# Altium PCB Core.PcbDoc
Units mil, origin at the board's own origin, x right, y up, seen from the top; angles counter-clockwise.
Board outline 1574.8 x 1620 mil, 2 copper layers (Top Layer, Bottom Layer); 36 components, 49 nets, 173 pads, 22 vias.
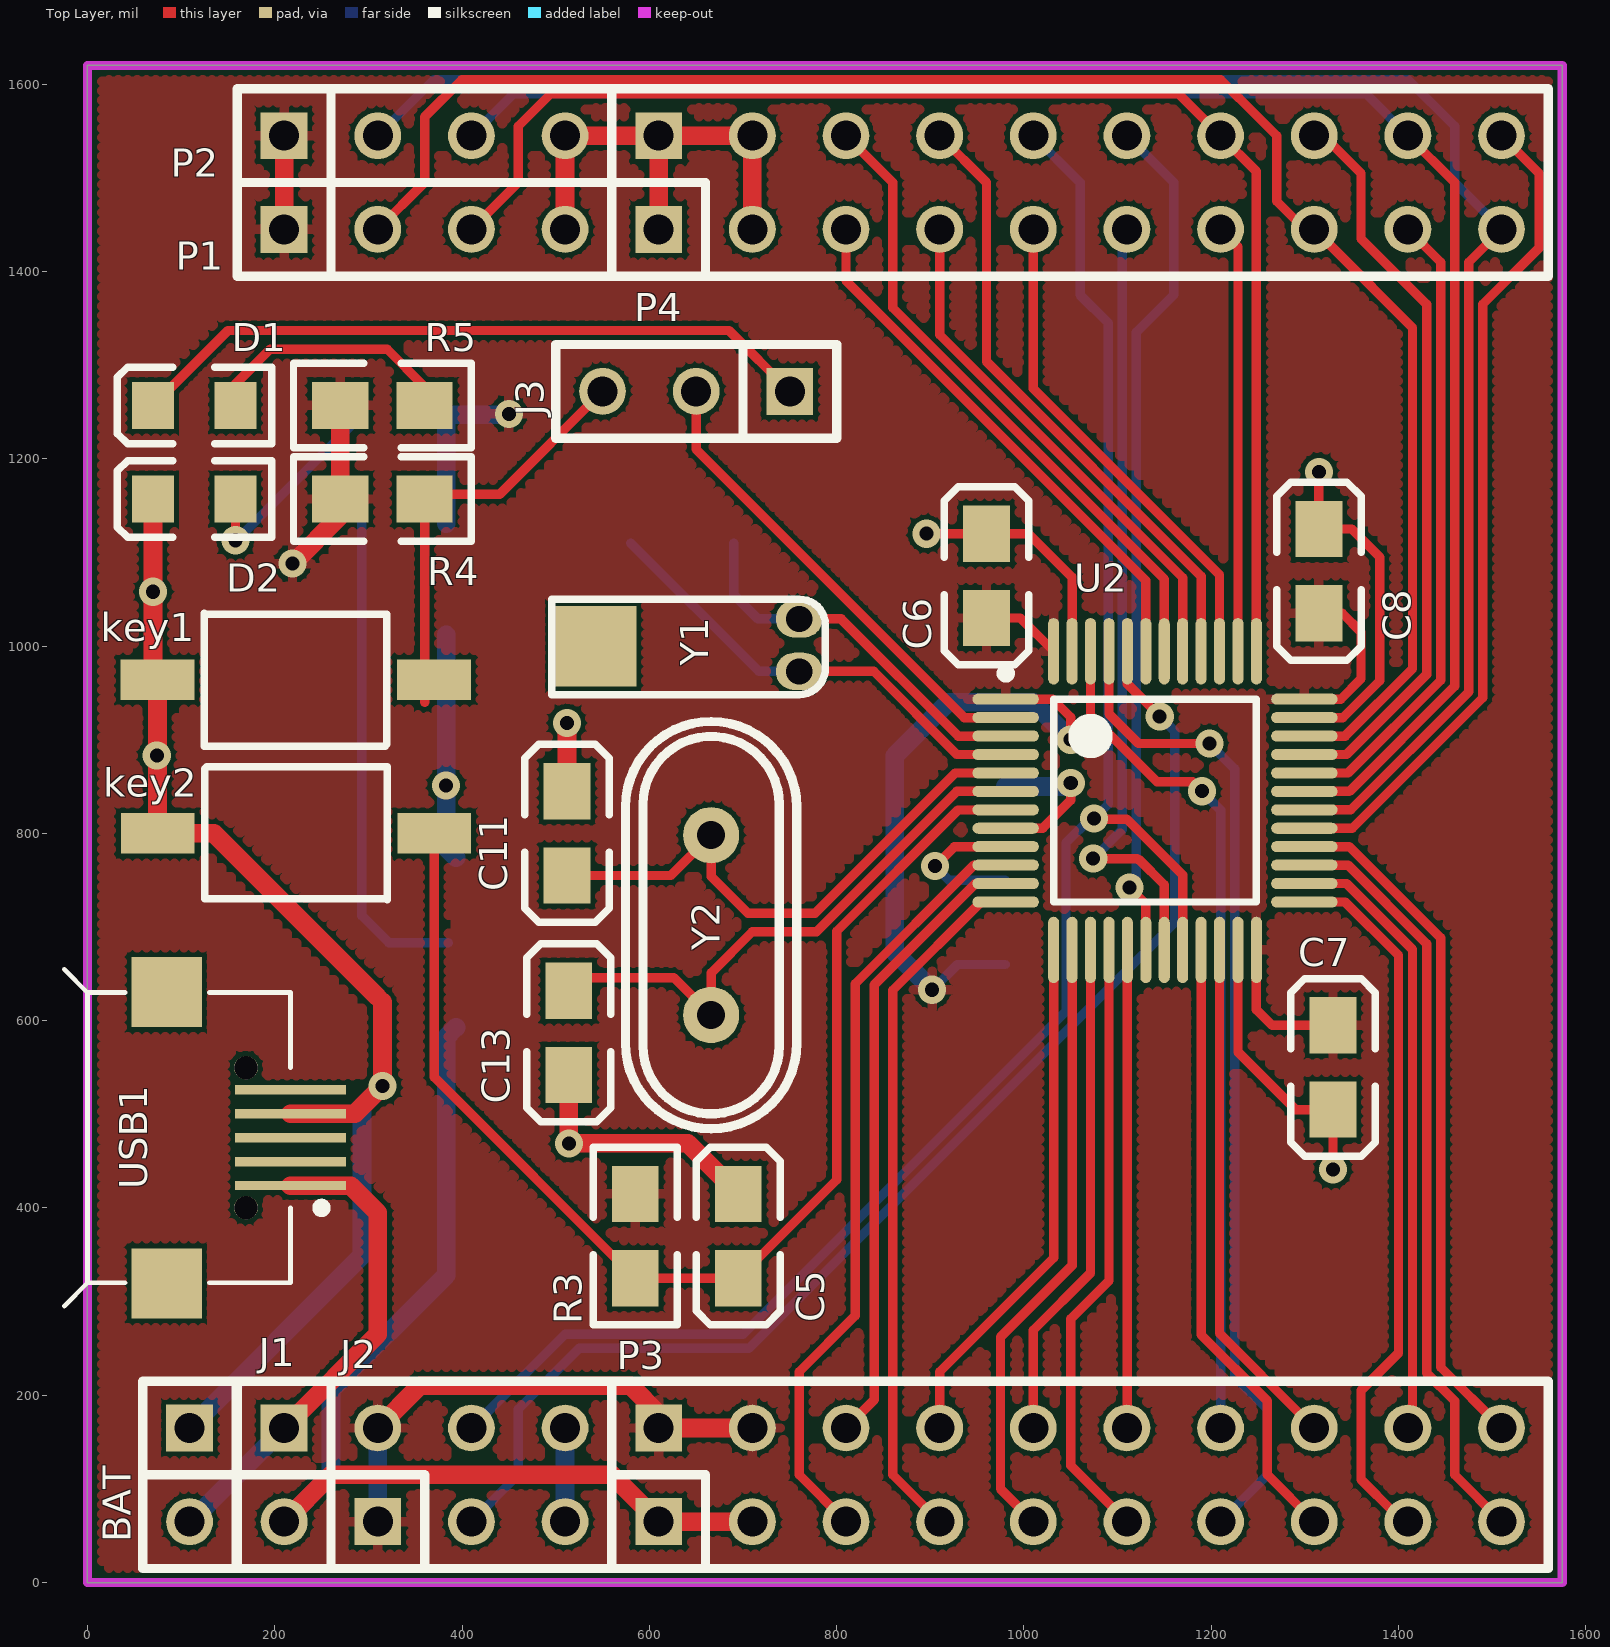
[diagram p0: Top Layer view]
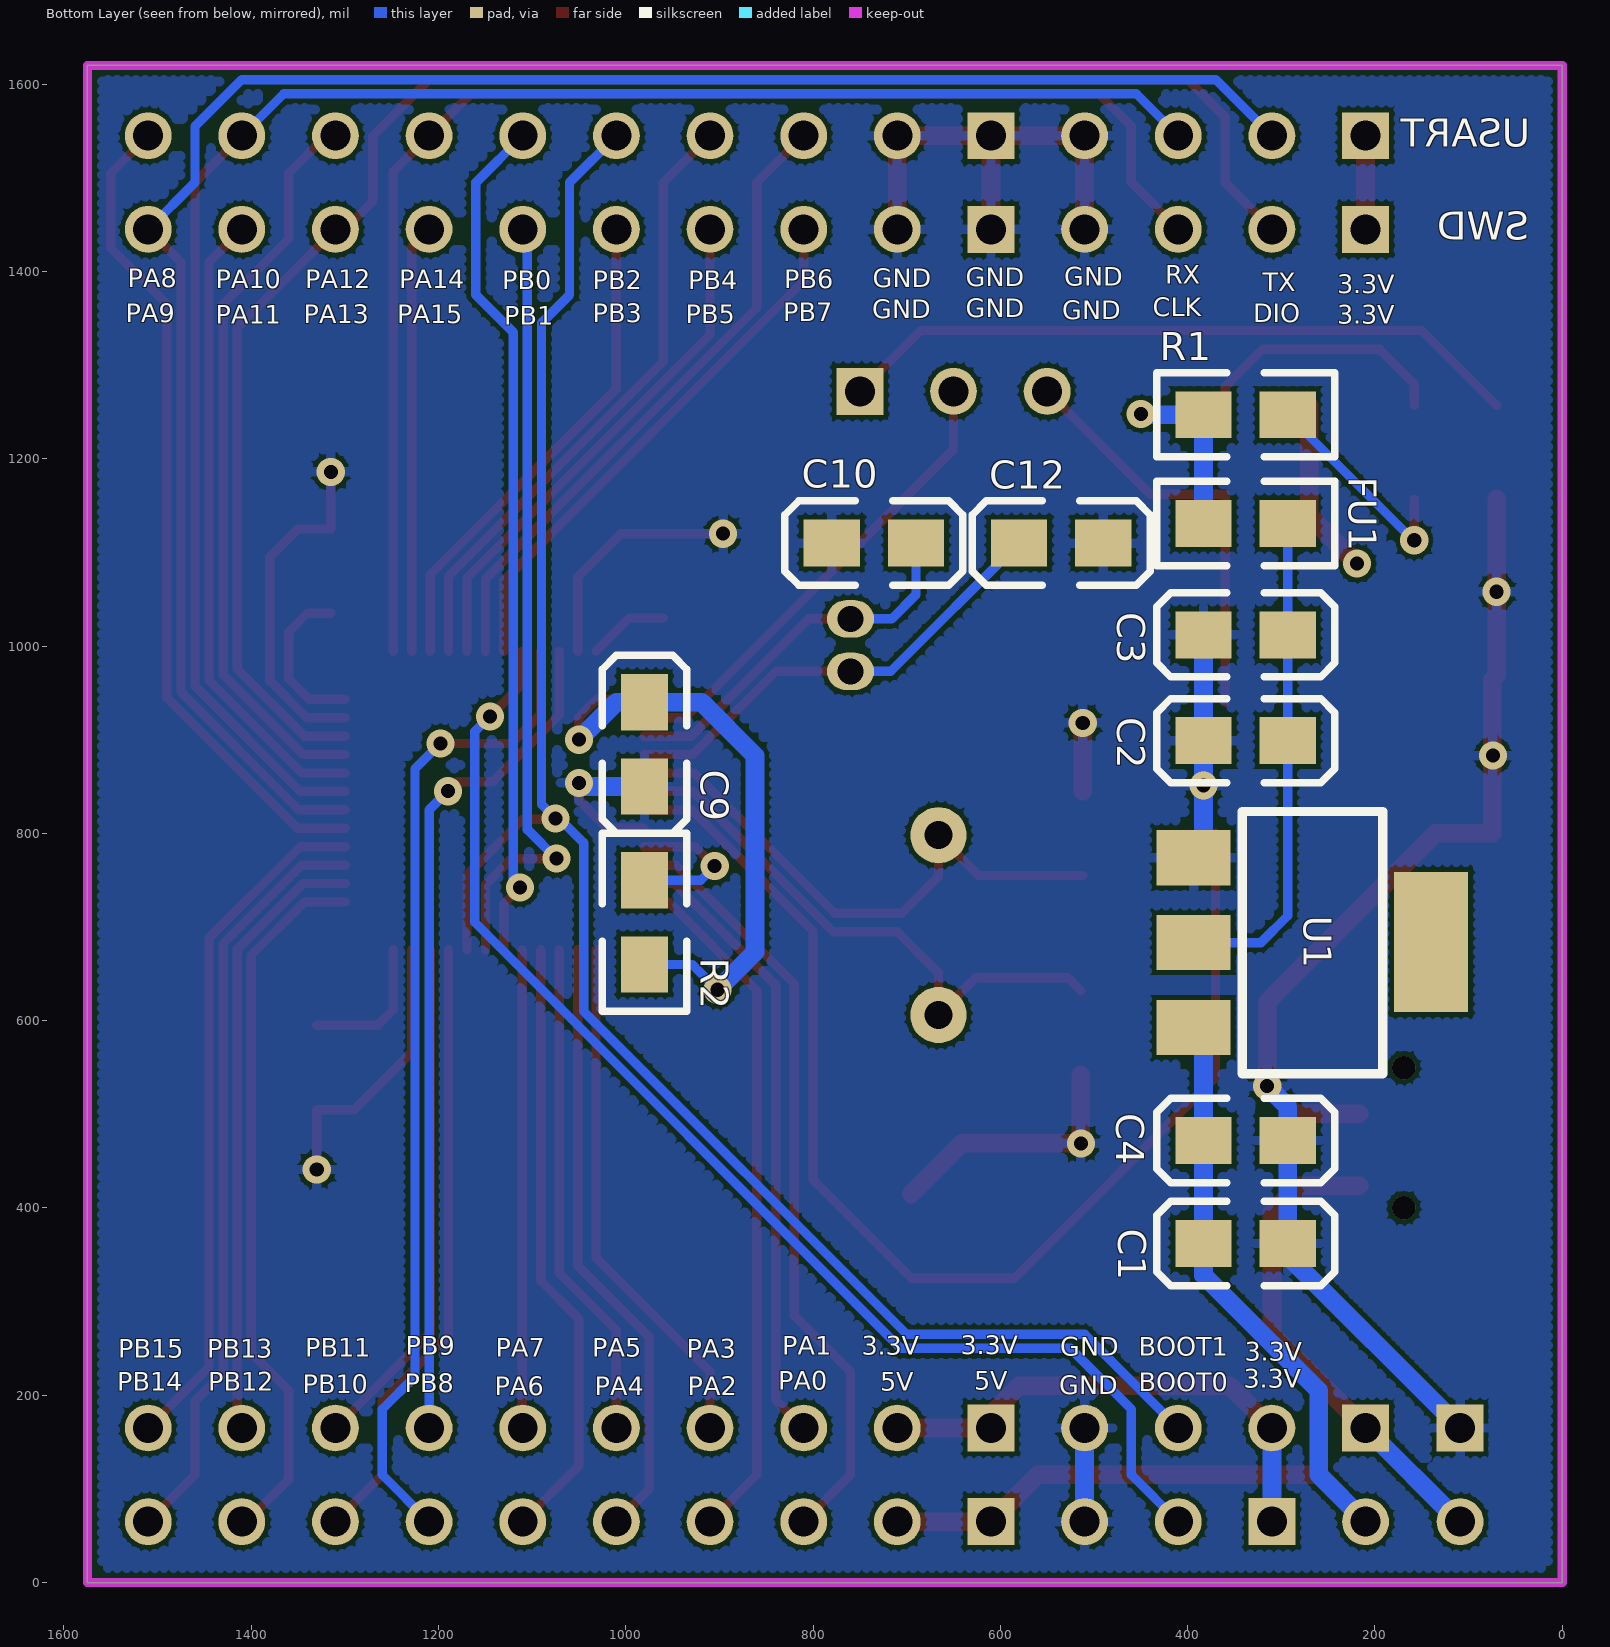
[diagram p1: Bottom Layer view, seen from below]
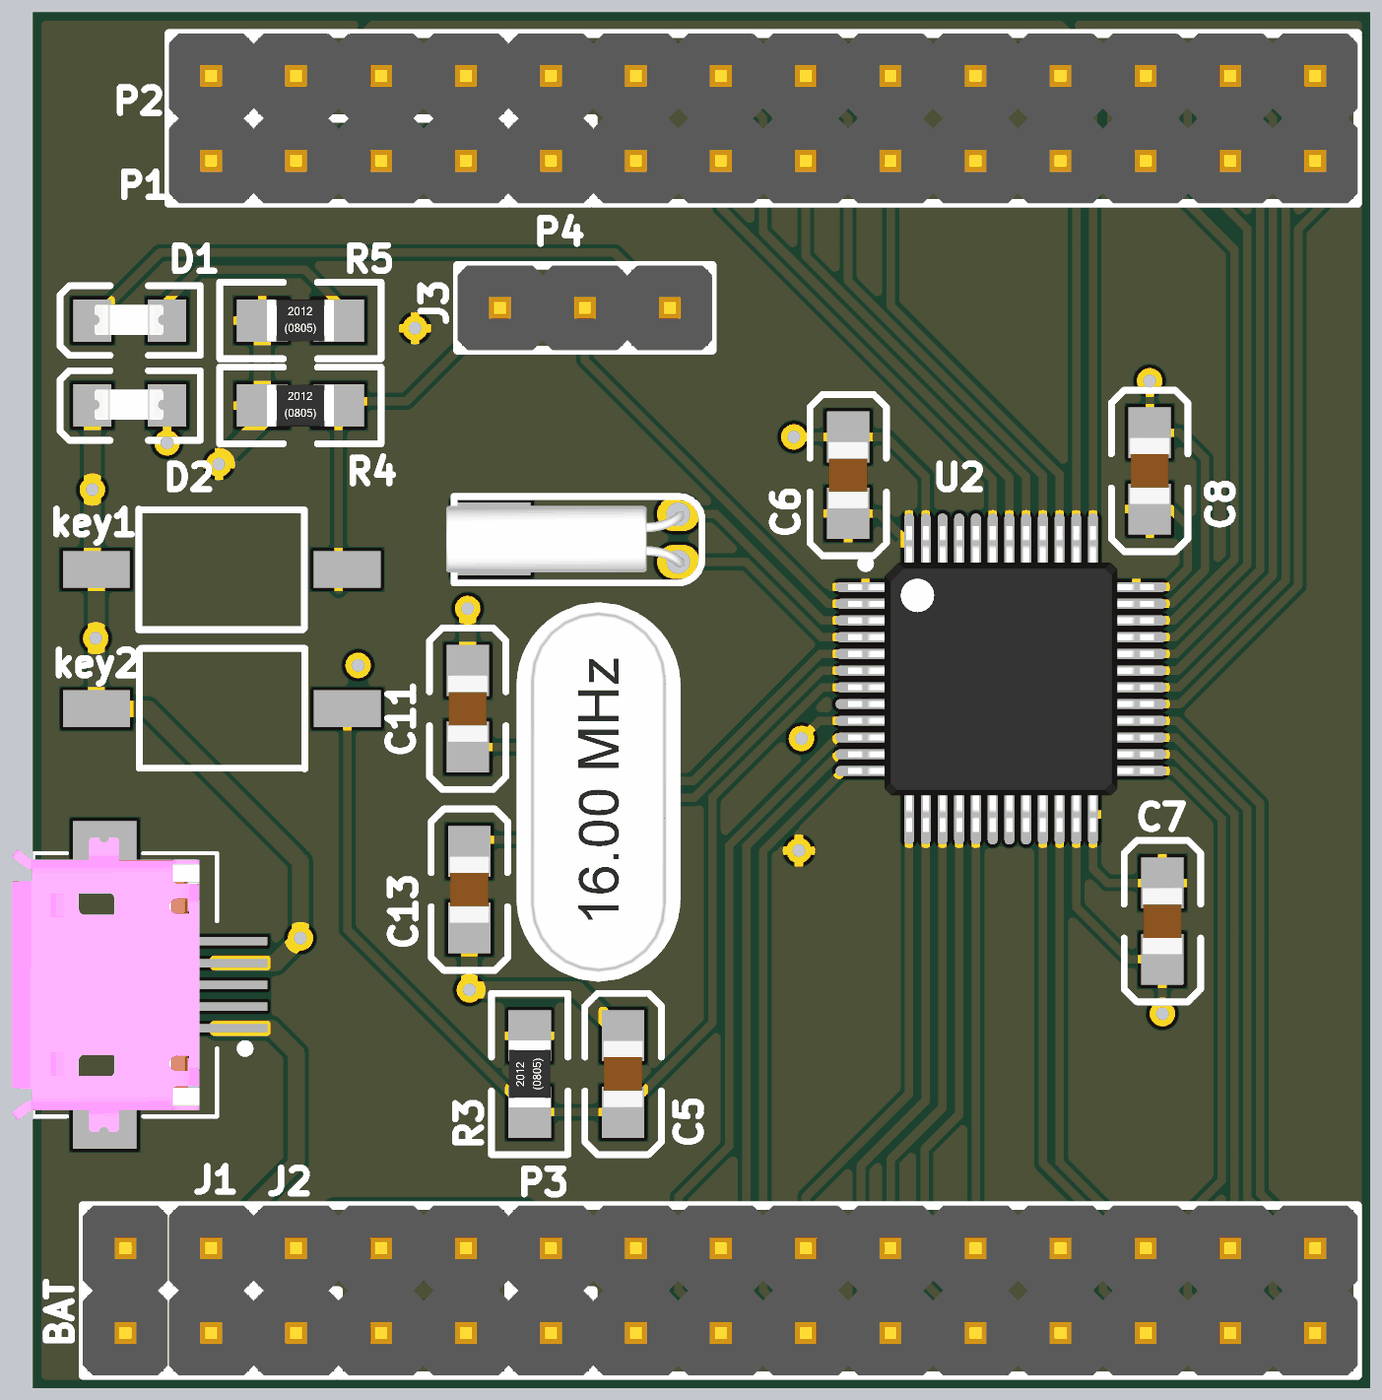
[diagram p2: 3D render of the assembled board from above, using the file's embedded part models]
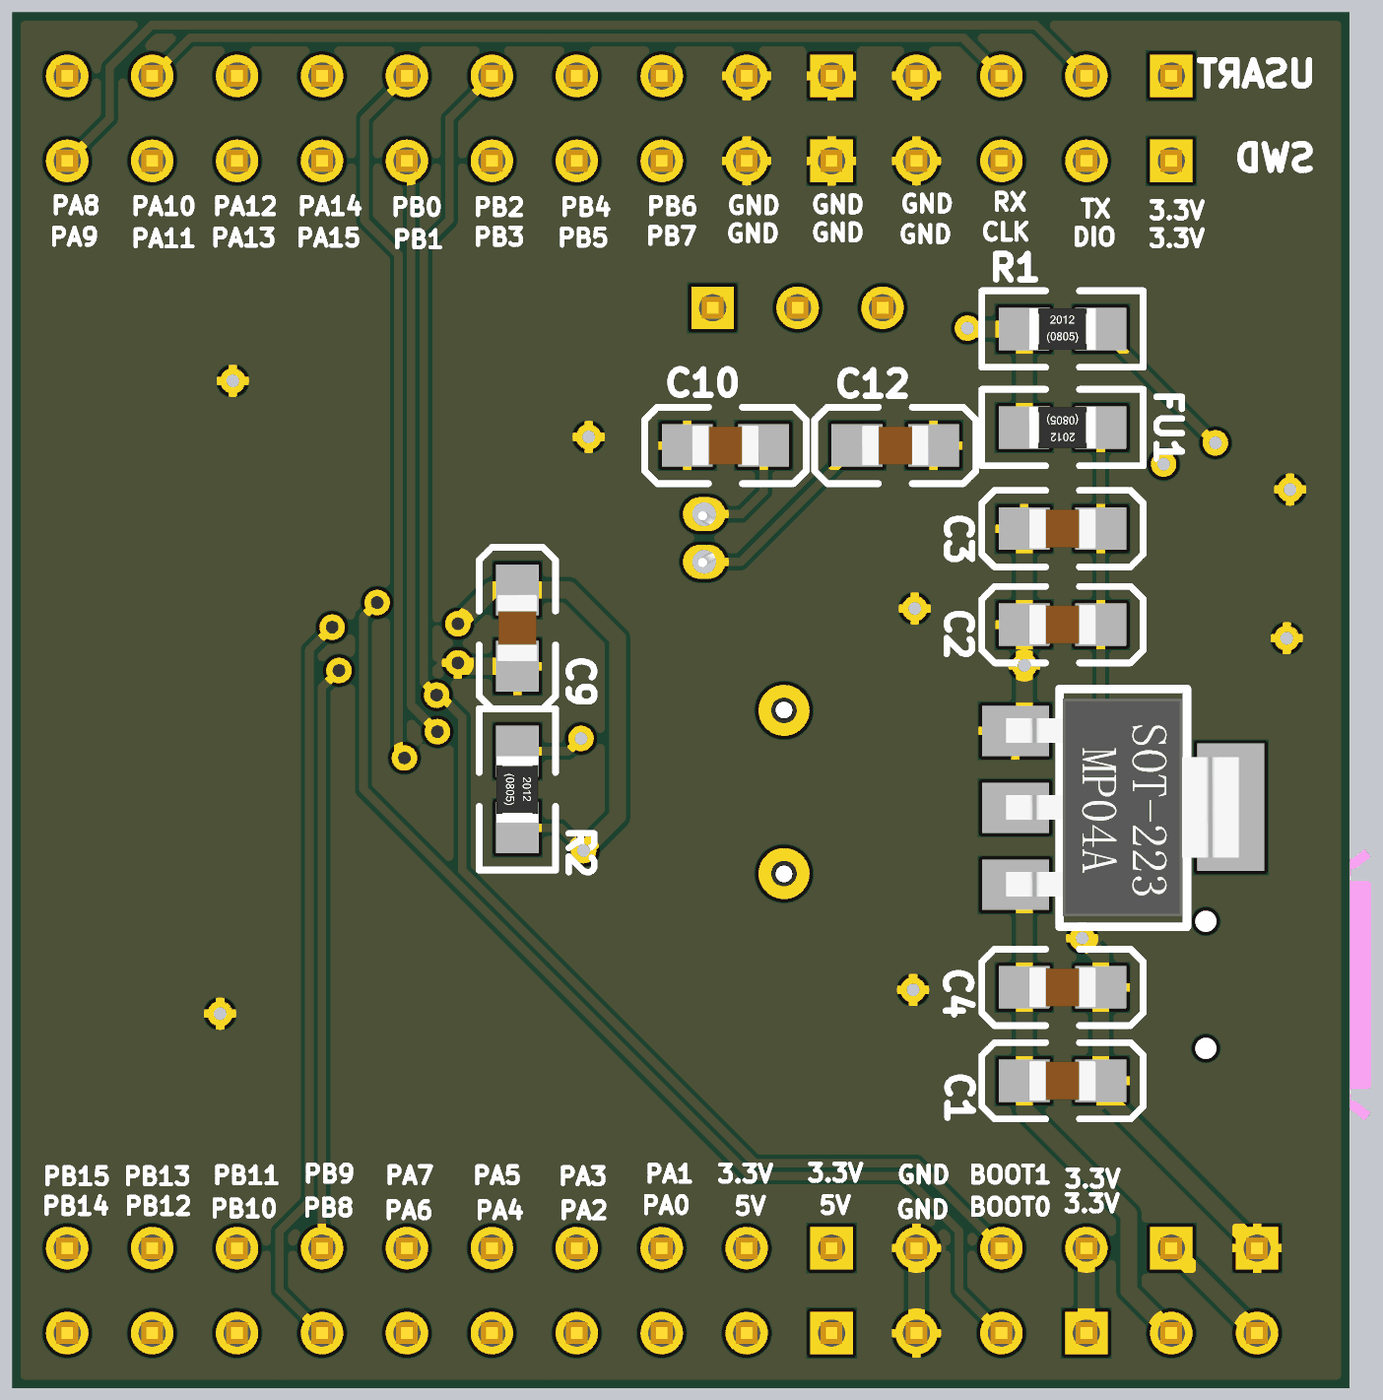
[diagram p3: 3D render of the assembled board from below, using the file's embedded part models]

## Layer stack, top to bottom
Top Layer: signal copper 1.4
Dielectric: dielectric 12.6, FR-4, Dk 4.8
Bottom Layer: signal copper 1.4

## Board outline
0,1620 0,0 1574.8,0 1574.8,1620 0,1620

## Design rules (kind name [scope] priority, off if disabled: settings)
Clearance slik [OnLayer('Top Overlay') vs OnLayer('Top Overlay')] p1: gap=2
Clearance [All] p2: gap=5
MinimumSolderMaskSliver [All] p1: minsoldermaskwidth=4
PolygonConnect [All] p1: connectstyle=Relief reliefconductorwidth=10 reliefentries=4 polygonreliefangle="90 Angle"
RoutingVias [All] p1: holewidth=15 width=30 viastyle="Through Hole" minholewidth=10 minwidth=20 maxholewidth=20 maxwidth=40
SilkToSilkClearance [All] p1: silktosilkclearance=0
SilkscreenOverComponentPads [All] p1: minsilkscreentomaskgap=-100
SolderMaskExpansion [All] p1: expansion=4
Width PWR [InNetClass('PWR')] p1: maxlimit=60 minlimit=20 preferedwidth=25
Width [All] p2: maxlimit=20 minlimit=6 preferedwidth=10
25 further rules are at their usual default settings.

## Components (designator, comment, footprint, x,y, rotation, side; value= is the part's Value field where it differs from the comment)
BAT "CON2" SIP2 109,165 r270 top
C1 "Cap" 0805C 383.04,362 r180 bottom
C2 "CapPol" 0805C 293.04,899 r0 bottom
C3 "Cap" 0805C 293.04,1012 r0 bottom
C4 "CapPol" 0805C 383.04,472 r180 bottom
C5 "Cap" 0805C 695,415 r270 top
C6 "Cap" 0805C 960,1030 r90 top
C7 "Cap" 0805C 1330,595 r270 top
C8 "Cap" 0805C 1315,1035 r90 top
C9 "Cap" 0805C 980,940 r270 bottom
C10 "Cap" 0805C 780,1110 r180 bottom
C11 "Cap" 0805C 512,845 r270 top
C12 "Cap" 0805C 490,1110 r0 bottom
C13 "Cap" 0805C 514,542 r90 top
D1 "LED" 0805D 158,1157 r180 top
D2 "LED" 0805D 158,1257 r180 top
FU1 "FUSE" 0805R 293.04,1131 r0 bottom
J1 "CON2" SIP2 210,165 r270 top
J2 "CON2X3" SIP2x3 310,65 r0 top
J3 "CON3" SIP3 750,1272 r180 top
key1 "KEY" KEY-3*6*2.5-SMD 74.72,964 r0 top
key2 "KEY" KEY-3*6*2.5-SMD 370.28,800 r180 top
P1 "JLINK-SWD" SIP4 210,1445 r0 top
P2 "USART" SIP4 210,1545 r0 top
P3 "CON2X10" SIP2x10 610,65 r0 top
P4 "CON2X10" SIP2x10 610,1445 r0 top
R1 "Res" 0805R 383.04,1247 r180 bottom
R2 "Res" 0805R 980,750 r270 bottom
R3 "Res" 0805R 585,325 r90 top
R4 "Res" 0805R 270,1157 r0 top
R5 "Res" 0805R 270,1257 r0 top
U1 "ASM1117" SOT223 393.54,773.88 r270 bottom
U2 "STM32F103C8T6" LQFP48_N 1140,835 r0 top
USB1 "USB" Micro_USB 0,475 r180 top
Y1 "XTAL" XTAL32 760,973 r180 top
Y2 "XTAL" HC-49S 666,702 r90 top

## Footprints (in the part's own frame and the unit in brackets; to place one, negate y for a bottom-side part, rotate by r counter-clockwise, add the part's x,y. Pads: shape width x height; smd on the part's side, far side on the other; paste and mask are expansions set on the pad)
0805C [mil]
  rect 60x50 smd: 1(0,0) 2(90,0)
  silkscreen extent -50,-45 140,45, body extent 6,-24 84,24, height 37
0805D [mil]
  rect 45x50 smd: 1(0,0) 2(88,0)
  silkscreen extent -39,-41 126,41, body extent 4,-19 86,17, height 33
0805R [mil]
  rect 60x50 smd: 1(0,0) 2(90,0)
  silkscreen extent -50,-45 140,45, body extent 6,-25 84,25, height 18
HC-49S [mil]
  round 60 hole 30: 1(-96.06,0) 2(96.06,0)
  silkscreen extent -218,-92 218,92, body extent -223,-92 223,92, height 142
KEY-3*6*2.5-SMD [mm]
  rect 2x1.1 smd: 1(0,0) 2(7.5,0)
  silkscreen extent 1.27,-1.8 6.22,1.8, body extent -0.35,-1.8 7.85,1.75, height 2.3
LQFP48_N [mm] "Thin QFP, 48-Leads, Body 7x7mm, Pitch 0.5mm, IPC Mediu"
  oval 1.8x0.3 smd: 1(-4.05,2.75) 2(-4.05,2.25) 3(-4.05,1.75) 4(-4.05,1.25) 5(-4.05,0.75) 6(-4.05,0.25) 7(-4.05,-0.25) 8(-4.05,-0.75) 9(-4.05,-1.25) 10(-4.05,-1.75) 11(-4.05,-2.25) 12(-4.05,-2.75) 25(4.05,-2.75) 26(4.05,-2.25) 27(4.05,-1.75) 28(4.05,-1.25) 29(4.05,-0.75) 30(4.05,-0.25) 31(4.05,0.25) 32(4.05,0.75) 33(4.05,1.25) 34(4.05,1.75) 35(4.05,2.25) 36(4.05,2.75)
  oval 0.3x1.8 smd: 13(-2.75,-4.05) 14(-2.25,-4.05) 15(-1.75,-4.05) 16(-1.25,-4.05) 17(-0.75,-4.05) 18(-0.25,-4.05) 19(0.25,-4.05) 20(0.75,-4.05) 21(1.25,-4.05) 22(1.75,-4.05) 23(2.25,-4.05) 24(2.75,-4.05) 37(2.75,4.05) 38(2.25,4.05) 39(1.75,4.05) 40(1.25,4.05) 41(0.75,4.05) 42(0.25,4.05) 43(-0.25,4.05) 44(-0.75,4.05) 45(-1.25,4.05) 46(-1.75,4.05) 47(-2.25,4.05) 48(-2.75,4.05)
  silkscreen extent -4.17,-2.75 2.75,3.57, body extent -4.57,-4.57 4.57,4.57, height 1.62
Micro_USB [mm]
  rect 3x0.25 smd: 1(-5.508,1.3) 2(-5.508,0.65) 3(-5.508,0) 4(-5.508,-0.65) 5(-5.508,-1.3)
  round 0.635 hole 0.635 unplated: MH1(-4.3,1.9) MH2(-4.3,-1.9)
  rect 1.9x1.9 smd: ""(-2.15,3.95) ""(-2.15,-3.95)
  silkscreen extent -6.47,-4.57 0.63,4.57, body extent -4.99,-4.4 0.64,4.4, height 2.89
SIP2 [mil]
  rect 50x50 hole 32: 1(0,0)
  round 50 hole 32: 2(100,0)
  silkscreen extent -50,-50 150,50, body extent -50,-50 150,50, height 398
SIP2x3 [mil]
  rect 50x50 hole 32: 1(0,0)
  round 50 hole 32: 2(0,100) 3(100,0) 4(100,100) 5(200,0) 6(200,100)
  silkscreen extent -50,-50 250,150, body extent -50,-50 250,150, height 398
SIP2x10 [mil]
  rect 50x50 hole 32: 1(0,0) 2(0,100)
  round 50 hole 32: 3(100,0) 4(100,100) 5(200,0) 6(200,100) 7(300,0) 8(300,100) 9(400,0) 10(400,100) 11(500,0) 12(500,100) 13(600,0) 14(600,100) 15(700,0) 16(700,100) 17(800,0) 18(800,100) 19(900,0) 20(900,100)
  silkscreen extent -50,-50 950,150, body extent -50,-50 950,150, height 398
SIP3 [mil]
  rect 50x50 hole 32: 1(0,0)
  round 50 hole 32: 2(100,0) 3(200,0)
  silkscreen extent -50,-50 250,50, body extent -50,-50 250,50, height 398
SIP4 [mil]
  rect 50x50 hole 32: 1(0,0)
  round 50 hole 32: 2(100,0) 3(200,0) 4(300,0)
  silkscreen extent -50,-50 350,50, body extent -50,-50 350,50, height 398
SOT223 [mil]
  rect 59x79 smd: 1(0,0) 2(90.55,0) 3(181.1,0)
  rect 150x79 smd: 4(89.88,253.54)
  silkscreen extent -49,52 231,202, body extent -38,-11 218,263, height 67
XTAL32 [mil]
  oval 50x40 hole 28: 1(0,0) 2(0,-56)
  rect 92.13x86 smd: ""(220,-27)
  silkscreen extent -28,-77 264,25, body extent -8,-66 274,13, height 79

## Part data
C1 C3 C5 C6 C7 C8 C9 C10 C11 C12 C13: "Capac"
C2 C4: "Polarized Capacitor (Axial)"
D1 D2: "Typical INFRARED GaAs"
J2: library part CO
P2: library part U
P3 P4: library part CON
R1 R2 R3 R4 R5: "Resi"
U1: library part ASM1
U2: "STM32 ARM-based 32-bit MCU"
Y1: "Crystal Oscill"
Y2: "¾§Õ"

## Via types
v1: diameter 30, hole 15, Top Layer to Bottom Layer, 22 vias

## Nets (pads, with @x,y where several pads share a name; then routed paths per layer and width w, separated by ;. In a path a pad name is that pad's centre, name@x,y a point inside that pad or via, vN(x,y) a via of type N, cw(c..) or ccw(c..) an arc to the next point about the centre after c; other vN are vias at no path point)
3.3V: C6.1 C7.1 C8.1 C9.1 FU1.2 J2.1 J2.2 P1.1 P2.1 P3.2 P3.4 R1.1 R2.2 R3.2 R4.1 R5.1 U2.1 U2.24 U2.36 U2.48 | length 2101.3
  Top Layer w10: C6.1 996.18,1030 U2.48 ; U2.1 1030.73,943.27 1050,924 v1(1050,900) ; U2.24 1248.27,611.73 1265,595 C7.1 ; U2.36 1338.27,943.27 1360,965 1360,1015 1340,1035 C8.1
  Top Layer w20: P1.1 P2.1 ; v1(219,1088) 270,1139 R4.1 R5.1 ; J2.2 355,210 580,210 P3.2@610,180 ; P3.2 P3.4
  Bottom Layer w10: v1(902,633) 929,660 R2.2
  Bottom Layer w20: J2.1 J2.2 ; FU1.2 R1.1 v1@450,1247 ; v1(902,633) 862,673 862,883 919,940 C9.1 1010,940 v1(1050,900)
  other v1: 450,1248
5V: C1.1 C4.1 J1.2 P3.1 P3.3 U1.3 | length 1145.2
  Top Layer w20: J1.2 260,115 560,115 P3.1 P3.3
  Bottom Layer w20: J1.2 260,115 260,205 383.04,328.04 C1.1 C4.1 383.04,582.28 U1.3
BOOT0: J2.3 U2.44 | length 1367.8
  Top Layer w10: U2.44 1110.47,959.53 v1(1145,925)
  Bottom Layer w10: J2.3 460,115 460,185 525,250 706.21,250 1161.21,705 1161.21,908.79 v1(1145,925)
BOOT1: J2.4 P4.10 U2.20 | length 2007.6
  Top Layer w10: v1@1075,815 1110,815 1169.53,755.47 U2.20
  Bottom Layer w10: J2.4 510,265 700,265 1045,610 1045,790 1071,816 v1(1075,816) 1090,831 1090,1345 1060,1375 1060,1495 P4.10
GND: BAT.1 C1.2 C2.2 C3.2 C4.2 C5.1 C6.2 C7.2 C8.2 C9.2 C10.1 C11.1 C12.1 C13.1 D1.2 J2.5 J2.6 key1.1 key2.2 P1.4 P2.4 P4.1 P4.2 P4.3 P4.4 U1.1 U2.8 U2.23 U2.35 U2.47 USB1.4 | length 3588.9
  Top Layer w10: key1.1@70,968.72 key1.1 ; v1(896,1120) C6.2 1005,1120 1051.42,1073.58 U2.47 ; U2.8 1019.96,805.47 ; 1020.47,805.99 1050,835.51 v1(1050,854) ; U2.23 1228.58,566.42 1290,505 C7.2 v1(1330,441) ; U2.35 1340.58,923.58 1380,963 1380,1095 1350,1125 C8.2 v1(1315,1186)
  Top Layer w20: key1.1@70,968.72 v1(70,1058) D1.2 ; key1.1 74.72,800 135,800 310,625 ; USB1.4 285.59,500.59 v1@310,525 ; v1(315,530) 315,620 ; P1.4 P2.4 P4.2 ; C11.1 v1(512,918) ; C13.1 v1(514,469) 641,469 C5.1 ; P4.1 P4.2 ; P4.3 P4.4 P4.2
  Bottom Layer w20: BAT.1 293.04,349.04 C1.2 C4.2 293.04,508.04 v1(315,530) ; C3.2 C2.2 383.04,784.38 U1.1 ; J2.5 J2.6 ; C9.2 v1@1046,850
  other v1: 383,851 74,883
NetC2_1: C2.1 C3.1 FU1.1 U1.2 | length 523
  Bottom Layer w10: FU1.1 C3.1 C2.1 293.04,711.96 321.67,683.33 U1.2@385.17,683.33
NetD1_1: D1.1 R1.2 | length 234.5
  Top Layer w10: v1(158,1113) D1.1
  Bottom Layer w10: v1(158,1113) 159.04,1113 R1.2
NetD2_1: D2.1 R5.2 | length 276.9
  Top Layer w10: D2.1 158,1280 195,1317 320,1317 360,1277 R5.2
NetD2_2: D2.2 J3.1 | length 740.1
  Top Layer w10: D2.2 150,1337 685,1337 J3.1
NetJ3_3: J3.3 key1.2 R4.2 | length 457.6
  Top Layer w10: 360,940 360,1162 440,1162 J3.3
NetR2_1: R2.1 U2.9 | length 165.4
  Top Layer w10: v1(905,765) 925.79,785.79 U2.9
  Bottom Layer w10: v1(905,765) 920,750 R2.1
NRST: C5.2 key2.1 R3.1 U2.7 | length 1322.1
  Top Layer w10: key2.1 370.28,539.72 R3.1 C5.2 800,430 800,695.36 929.64,825 980.39,825 U2.7
PA0: P3.5 U2.10 | length 833
  Top Layer w10: P3.5 760,115 760,225 820,285 820,639.42 946.69,766.1 U2.10
PA1: P3.6 U2.11 | length 671
  Top Layer w10: P3.6 840,195 840,638.2 948.21,746.42 U2.11
PA2: P3.7 U2.12 | length 747.8
  Top Layer w10: P3.7 860,115 860,632.57 954.16,726.73 U2.12
PA3: P3.8 U2.13 | length 561
  Top Layer w10: P3.8 910,225 1031.73,346.73 U2.13
PA4: P3.9 U2.14 | length 656.7
  Top Layer w10: P3.9 975,100 975,262.16 1051.42,338.58 U2.14
PA5: P3.10 U2.15 | length 535.9
  Top Layer w10: P3.10 1010,269.32 1071.1,330.42 U2.15
PA6: P3.11 U2.16 | length 652.3
  Top Layer w10: U2.16 1090.79,322.27 1050,281.48 1050,125 P3.11
PA7: P3.12 U2.17 | length 510.7
  Top Layer w10: P3.12 1110.47,165.47 1110.47,314.12 U2.17
PA8: P4.20 U2.29 | length 889.9
  Top Layer w10: U2.29 1350.64,805.47 1490,944.83 1490,1365 1550,1425 1550,1505 P4.20
PA9: P2.2 P4.19 U2.30 | length 2062.3
  Top Layer w10: U2.30 1349.11,825.16 1475,951.04 1475,1410 P4.19
  Bottom Layer w10: P2.2 369.8,1604.8 1410.2,1604.8 1460,1555 1460,1495 P4.19
PA10: P2.3 P4.18 U2.31 | length 1852.7
  Top Layer w10: U2.31 1347.58,844.84 1460,957.26 1460,1495 P4.18
  Bottom Layer w10: P2.3 454.8,1589.8 1365.2,1589.8 P4.18
PA11: P4.17 U2.32 | length 683.8
  Top Layer w10: U2.32 1346.06,864.53 1445,963.47 1445,1410 1410.63,1444.37 1409.37,1444.37 P4.17
PA12: P4.16 U2.33 | length 796.8
  Top Layer w10: U2.33 1344.53,884.21 1430,969.68 1430,1365 1360,1435 1360,1505 1320,1545 P4.16
PA13: P1.2 P4.15 U2.34 | length 1872.4
  Top Layer w10: P1.2 360,1495 360,1565 399.8,1604.8 1210,1604.8 1229.8,1585 1230,1585 1270,1545 1270,1475 1300,1445 P4.15 1330,1425 1415,1340 1415,975.9 1343,903.9 U2.34
PA14: P1.3 P4.14 U2.37 | length 1480.1
  Top Layer w10: P1.3 460,1495 460,1555 494.8,1589.8 1165.2,1589.8 P4.14 1248.27,1506.73 U2.37
PA15: P4.13 U2.38 | length 458.2
  Top Layer w10: P4.13 1228.58,1426.42 U2.38
PB0: P4.12 U2.18 | length 916.8
  Top Layer w10: v1(1112.93,742.07) 1130.16,724.84 U2.18
  Bottom Layer w10: P4.12 1160,1495 1160,1375 1120,1335 1120,749.14 v1(1112.93,742.07)
PB1: P4.11 U2.19 | length 843.9
  Top Layer w10: v1(1074,773) 1121,773 1122,772 1123,772 1149.84,745.16 U2.19
  Bottom Layer w10: v1(1074,773) 1105,804 1105,1440 P4.11
PB3: P4.9 U2.39 | length 532.9
  Top Layer w10: P4.9 1010,1275 1208.9,1076.1 U2.39
PB4: P4.8 U2.40 | length 666.2
  Top Layer w10: P4.8 960,1495 960,1303.79 1189.21,1074.57 U2.40
PB5: P4.7 U2.41 | length 580.2
  Top Layer w10: P4.7 925.68,1445 910,1429.32 910,1332.57 1169.53,1073.05 U2.41
PB6: P4.6 U2.42 | length 691.3
  Top Layer w10: P4.6 860,1495 860,1361.36 1149.84,1071.52 U2.42
PB7: P4.5 U2.43 | length 583.2
  Top Layer w10: P4.5 810,1390.15 1130.16,1069.99 U2.43
PB8: P3.13 U2.45 | length 1064.6
  Top Layer w10: U2.45 1090.79,927.59 1122.37,896 v1(1198,896)
  Bottom Layer w10: v1(1198,896) 1225,869 1225,852 1225,220 1260,185 1260,115 P3.13
PB9: P3.14 U2.46 | length 909.1
  Top Layer w10: U2.46 1071.1,926.06 1142.16,855 1180,855 v1(1190,845)
  Bottom Layer w10: v1(1190,845) 1210,825 P3.14
PB10: P3.15 U2.21 | length 660.6
  Top Layer w10: U2.21 1189.21,264.57 1260,193.79 1260,115 P3.15
PB11: P3.16 U2.22 | length 538.3
  Top Layer w10: U2.22 1208.9,266.1 P3.16@1300,175
PB12: P3.17 U2.25 | length 789.1
  Top Layer w10: U2.25 1343,726.73 1400,669.73 1400,245 1360,205 1360,110 1395,75 1420,75 P3.17
PB13: P3.18 U2.26 | length 657.8
  Top Layer w10: U2.26 1344.53,746.42 1415,675.95 1415,170 P3.18
PB14: P3.19 U2.27 | length 815.6
  Top Layer w10: U2.27 1346.06,766.1 1430,682.16 1430,223.79 1460,193.79 1460,115 P3.19
PB15: P3.20 U2.28 | length 736.2
  Top Layer w10: U2.28 1347.58,785.79 1445,688.37 1445,230 P3.20
PC13: J3.2 U2.2 | length 511.2
  Top Layer w10: J3.2 650,1210 936.42,923.58 U2.2
VUSB: BAT.2 J1.1 USB1.1 | length 518.9
  Top Layer w10: J1.1 J1.1@216.85,171.85
  Top Layer w20: J1.1@216.85,171.85 310,265 310,395 281.18,423.82 USB1.1
  Bottom Layer w10: BAT.2 BAT.2@110,65
  Bottom Layer w20: BAT.2@110,65 J1.1
XI1: C11.2 U2.5 Y2.2 | length 608.8
  Top Layer w10: C11.2 622.94,755 Y2.2 666,754 705.31,714.69 776.9,714.69 926.75,864.53 U2.5
XI2: C10.2 U2.3 Y1.2 | length 408.1
  Top Layer w10: Y1.2 804.79,1029 929.89,903.9 U2.3
  Bottom Layer w10: C10.2 690,1055 716,1029 Y1.2
XO1: C13.2 U2.6 Y2.1 | length 614.3
  Top Layer w10: C13.2 528,646 625.94,646 Y2.1 666,651 710,695 778.43,695 928.27,844.84 U2.6
XO2: C12.2 U2.4 Y1.1 | length 494.1
  Top Layer w10: Y1.1 839.57,973 928.36,884.21 U2.4
  Bottom Layer w10: C12.2 717,973 Y1.1
pads on no net: U1.4 USB1. USB1.2 USB1.3 USB1.5 USB1.MH1 USB1.MH2 Y1.

## Polygon pours and split planes (outlines as drawn)
GND on Bottom Layer "Bottom Layer-No Net" (hatched 90Degree grid 10 track 11, pour order 2): 0,1620 0,0 1577,0 1577,1620 0,1620
3.3V on Top Layer "Bottom Layer-No Net" (hatched 90Degree grid 10 track 11, pour order 4): -3,1620 -3,0 1574.8,0 1574.8,1620 -3,1620

## Keep-outs
Keep-Out Layer:
  lines w10: -4574,-1856 -4562,-1868 ; -2494,-1868 -2489,-1863 ; 0,0 1574.8,0 1574.8,1620 0,1620 0,0

## Silkscreen, mask and mechanical layers (free items; w line width, h text height)
Bottom Overlay:
  text "USART" at 34,1533 h30
  text "SWD" at 35,1434 h30
  text "RX" at 424,1387 h20
  text "GND" at 532,1385 h20
  text "GND" at 637,1384 h20
  text "GND" at 736,1383 h20
  text "PA8" at 1532,1383 h20
  text "PB6" at 831,1382 h20
  text "PA14" at 1242,1382 h20
  text "PA12" at 1342,1382 h20
  text "PA10" at 1438,1382 h20
  text "PB4" at 933,1381 h20
  text "PB2" at 1035,1381 h20
  text "PB0" at 1132,1381 h20
  text "TX" at 320,1379 h20
  text "3.3V" at 240,1377 h20
  text "CLK" at 437,1352 h20
  text "GND" at 637,1351 h20
  text "GND" at 737,1350 h20
  text "GND" at 534,1349 h20
  text "PB7" at 832,1347 h20
  text "DIO" at 330,1346 h20
  text "PB3" at 1035,1346 h20
  text "PA9" at 1534,1346 h20
  text "PB5" at 936,1345 h20
  text "PA15" at 1244,1345 h20
  text "PA13" at 1344,1345 h20
  text "3.3V" at 240,1344 h20
  text "PA11" at 1438,1344 h20
  text "PB1" at 1130,1343 h20
  text "3.3V" at 642,244 h20
  text "3.3V" at 748,243 h20
  text "PA1" at 833,243 h20
  text "PB9" at 1235,243 h20
  text "BOOT1" at 452,242 h20
  text "GND" at 536,242 h20
  text "PA5" at 1036,241 h20
  text "PA7" at 1139,241 h20
  text "PB11" at 1342,241 h20
  text "PA3" at 935,240 h20
  text "PB13" at 1447,240 h20
  text "PB15" at 1542,240 h20
  text "3.3V" at 339,237 h20
  text "3.3V" at 340,208 h20
  text "5V" at 628,206 h20
  text "PA0" at 837,206 h20
  text "5V" at 728,205 h20
  text "PB12" at 1446,205 h20
  text "PB14" at 1543,205 h20
  text "BOOT0" at 452,204 h20
  text "PB8" at 1236,203 h20
  text "PB10" at 1345,202 h20
  text "GND" at 537,201 h20
  text "PA2" at 934,200 h20
  text "PA4" at 1033,200 h20
  text "PA6" at 1140,200 h20